# EAGLE board codeLock2layer (EAGLE 7.7.0)
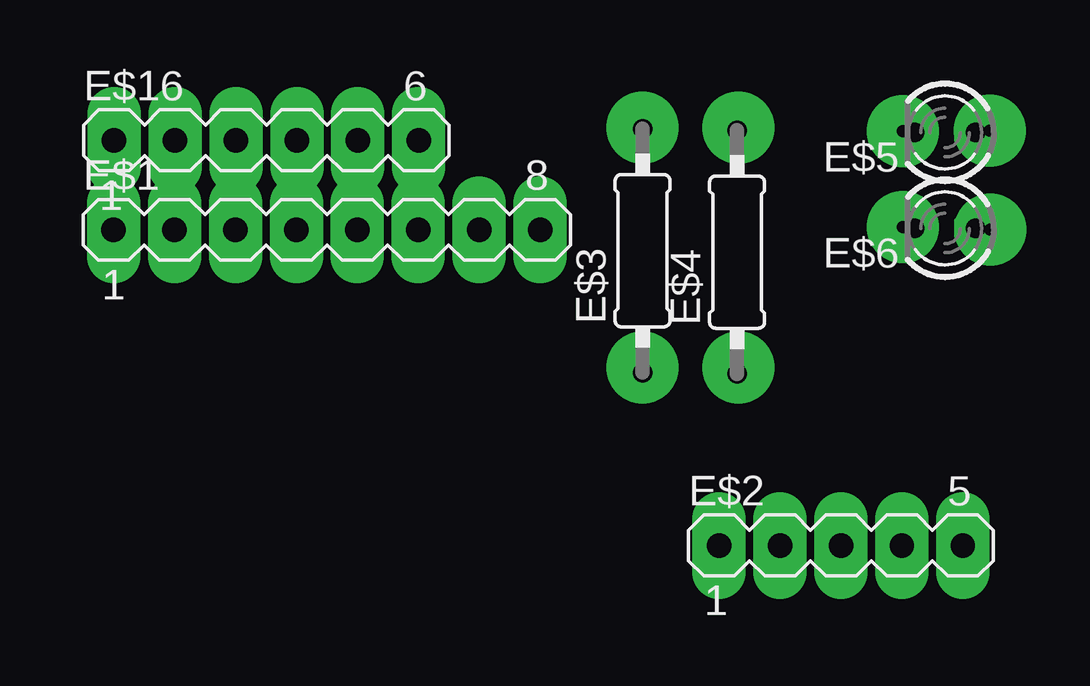
[diagram p0: board, top side]
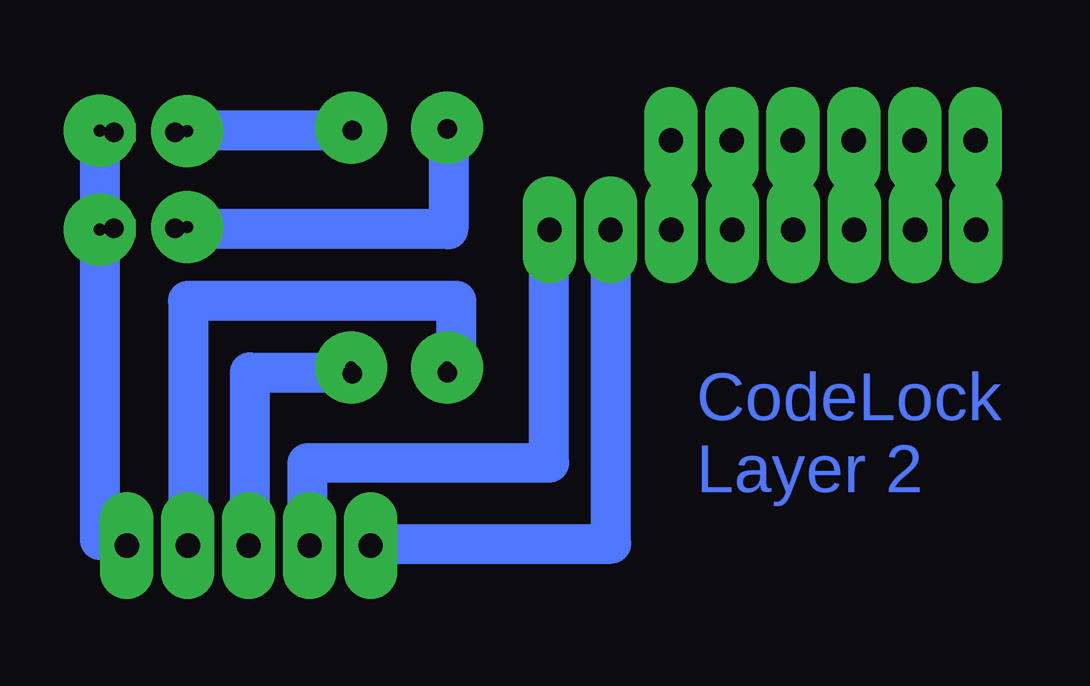
[diagram p1: board, bottom side, seen from below]

No outline drawn. Coordinates in mm, seen from the top.
Copper layers (1*16): Top 0.035mm / dielectric 1.5mm / Bottom 0.035mm
Design rules "default *": minimum track width 10mil, minimum drill 24mil, track to track 8mil, track to pad 8mil, pad to pad 8mil, via to via 8mil, smd to smd 8mil, copper to edge 40mil, drill to drill 8mil, minimum pad ring 10mil, minimum via ring 8mil, stop-mask expansion 4mil, vias tented up to drill 0mil, thermal gap 10mil

## Footprints (pad centres in the part's own frame; a part is rotated, then mirrored left to right if it is on the bottom)
MA08-1 = drill 1.016 long: 1 -8.89,0; 2 -6.35,0; 3 -3.81,0; 4 -1.27,0; 5 1.27,0; 6 3.81,0; 7 6.35,0; 8 8.89,0
MA05-1 = drill 1.016 long: 1 -5.08,0; 2 -2.54,0; 3 0,0; 4 2.54,0; 5 5.08,0
0207/10 = drill 0.813 octagon: 1 -5.08,0; 2 5.08,0
LED3MM = drill 0.813 octagon: A -1.27,0; K 1.27,0
MA06-1 = drill 1.016 long: 1 -6.35,0; 2 -3.81,0; 3 -1.27,0; 4 1.27,0; 5 3.81,0; 6 6.35,0

## Placement (x,y rotation side)
E$1  [MA08-1]  52.23,70.94 0 top
E$2  [MA05-1]  73.66,57.78 0 top
E$3  [0207/10]  65.39,70.07 90 top
E$4  [0207/10]  69.33,70.01 90 top
E$5  [LED3MM]  78,75 180 top
E$6  [LED3MM]  78,71 180 top
E$16  [MA06-1]  49.71,74.67 0 top

## Library data of the parts
E$1 E$2 E$16 = con-lstb
E$3 E$4 = rcl
E$5 E$6 = led

## Tracks (layer width: path | path; a pad name or v marks a point on that pad's centre or on a via)
S$1
  Bottom 1.676: 68.61,57.85 58.55,57.85 58.55,70.87
S$2
  Bottom 1.676: 71.21,57.55 71.21,61.22 61.14,61.24 61.14,71.09
S$3
  Bottom 1.676: 65,65 65,67.98 76.19,67.98 76.19,57.73
S$4
  Bottom 1.676: 73.6,57.79 73.6,65 69.33,65
S$5
  Bottom 1.676: 69.38,75.14 69.38,75.08 76.36,75.08
S$6  (via drill 0.5 pad 3)
  other vias: 65.39,75.19 69.39,75.19 69.39,65.19 65.39,65.19 79.86,75.07 79.88,70.94 76.23,75.05 76.23,71.05
S$7
  Bottom 1.676: 65.33,75.19 65.33,70.97 76.42,70.97
S$8
  Bottom 1.676: 79,58 79.85,58 79.85,75.14

## Text on the board
Bottom: CodeLock / Layer 2